# Altium PCB Chrono_dot.PcbDoc
Units mil, origin at the board's own origin, x right, y up, seen from the top; angles counter-clockwise.
Board outline 1890 x 1320 mil, 2 copper layers (Top Layer, Bottom Layer), stack 65.792 mil thick; 4 components, 4 nets, 22 pads, 68 vias.
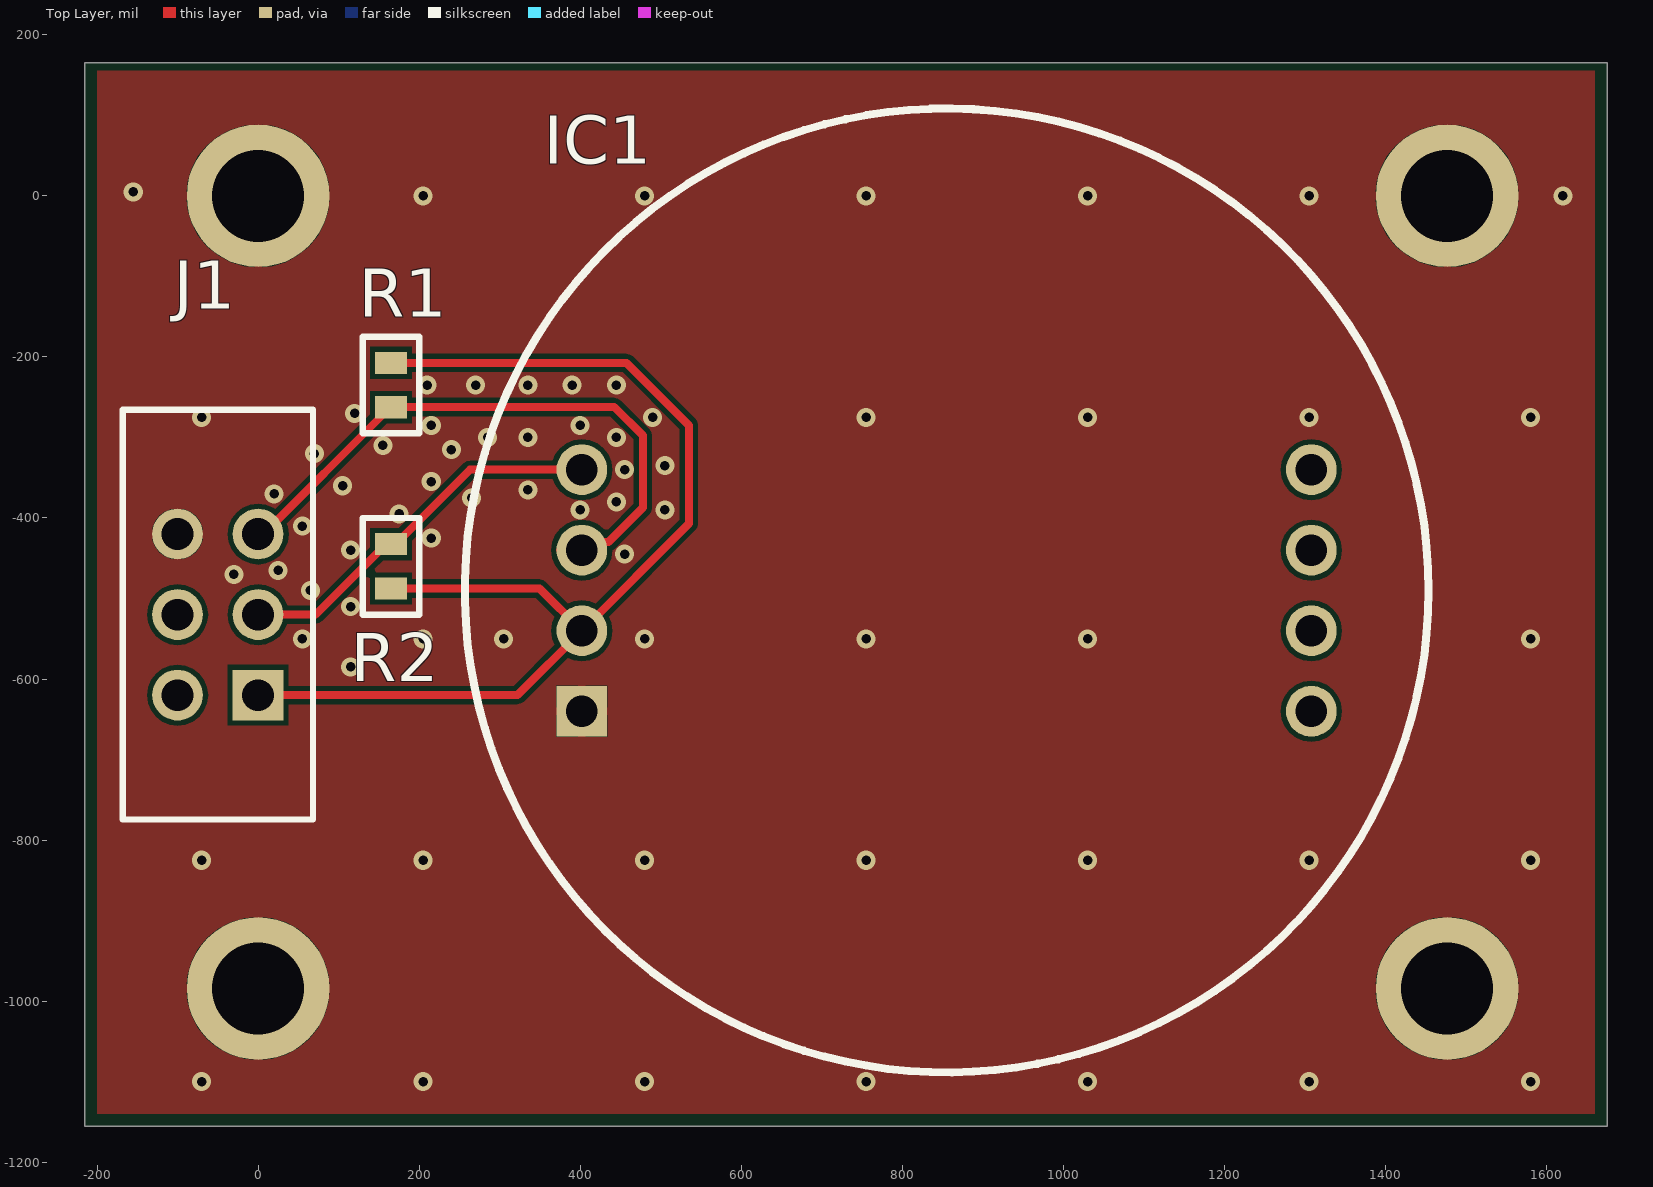
[diagram p0: Top Layer view]
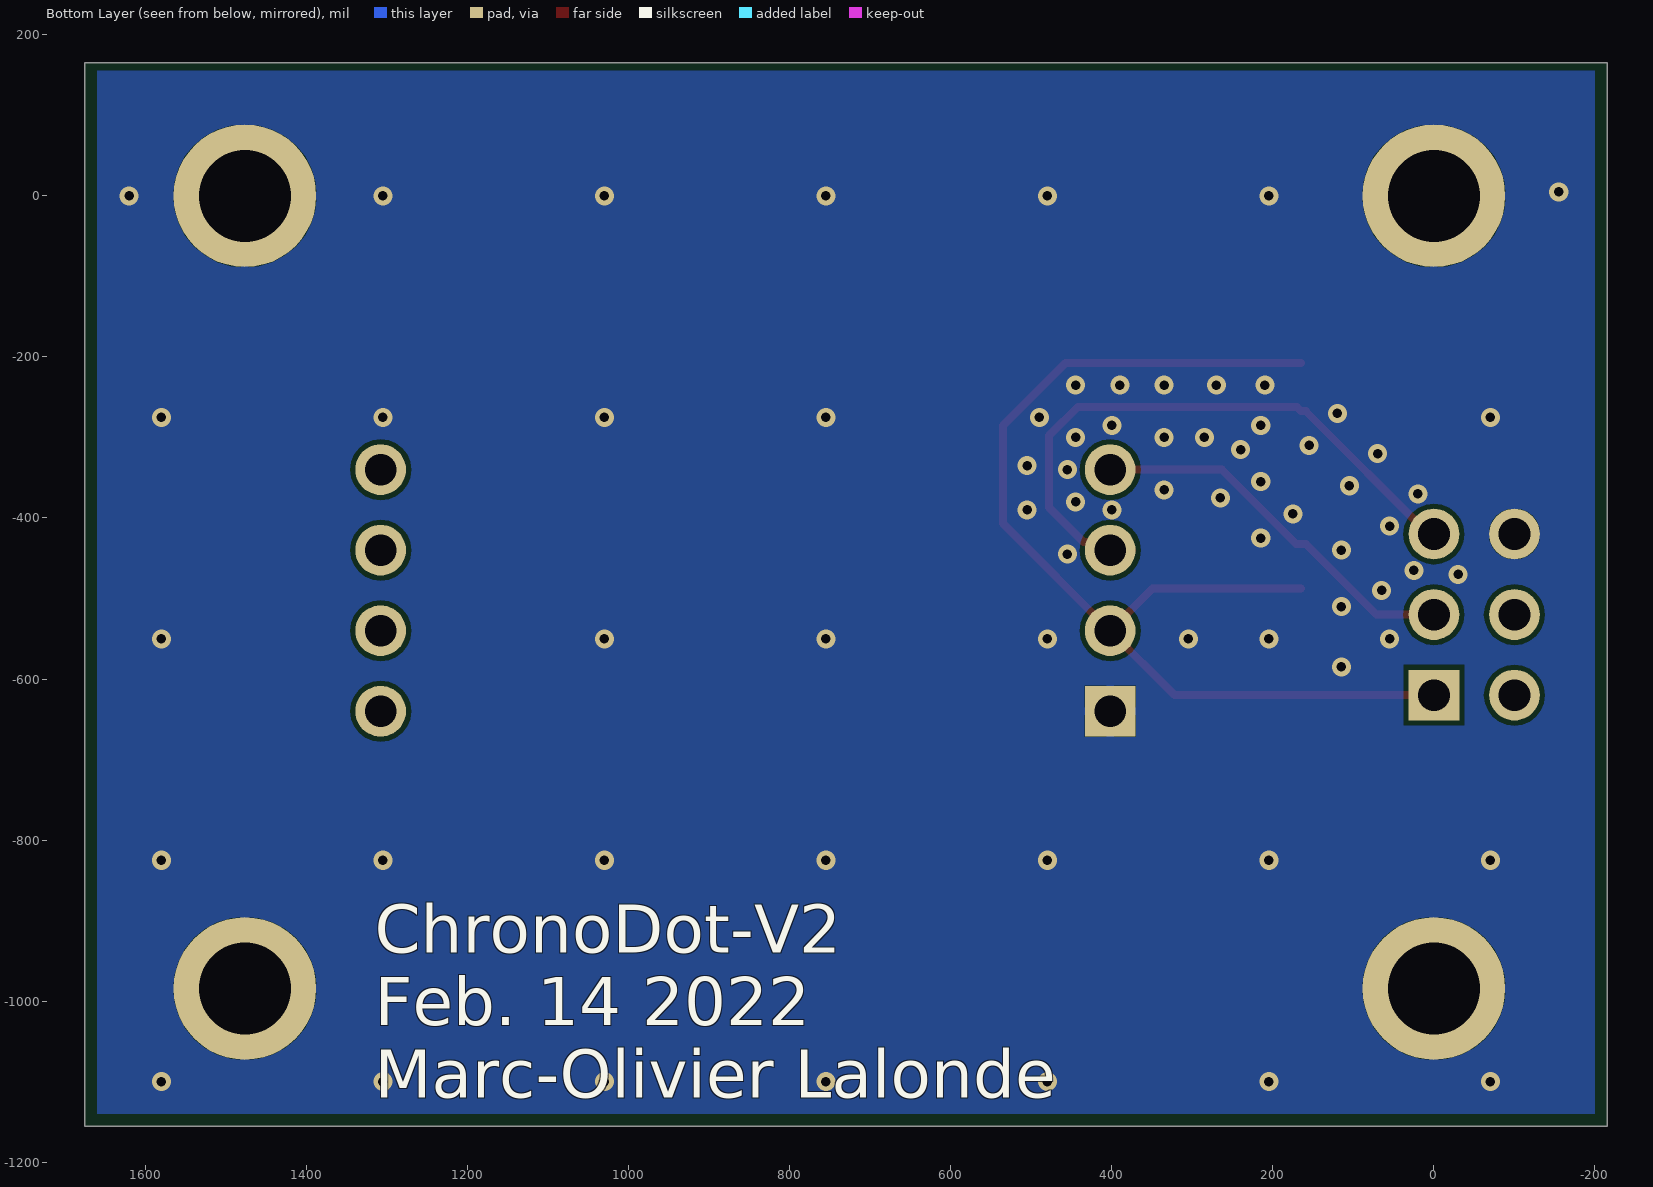
[diagram p1: Bottom Layer view, seen from below]

## Layer stack, top to bottom
Top Solder: solder mask 0.4, Solder Resist, Dk 3.5
Top Layer: signal copper 1.4
Dielectric 1: dielectric 62.9921, FR-4, Dk 4.8
Bottom Layer: signal copper 1.4
Bottom Solder: solder mask 0.4, Solder Resist, Dk 3.5

## Board outline
1675,165 -215,165 -215,-1155 1675,-1155

## Design rules (kind name [scope] priority, off if disabled: settings)
Clearance [All] p1: gap=6 ignorepadtopadclearanceinfootprint=TRUE except(0: Arc-Hole Track-Hole SMDPad-Hole THPad-Hole Via-Hole Fill-Hole Poly-Hole Region-Hole Text-Hole)
HoleSize [All] p1: absolutevalues=TRUE maxlimit=244.09 minlimit=7.87 maxpercent=80.000 minpercent=20.000
PolygonConnect [(ObjectKind = 'Via') And (InNet('GND')) vs ((ObjectKind = 'Poly') And (Net = 'GND'))] p1: connectstyle=Direct reliefconductorwidth=10 reliefentries=4 polygonreliefangle="90 Angle" airgapwidth=10
RoutingVias [All] p1: holewidth=28 width=50 viastyle="Through Hole" minholewidth=28 minwidth=50 maxholewidth=28 maxwidth=50
SolderMaskExpansion [All] p1: expansion=4
Width [All] p1: maxlimit=10 minlimit=6 preferedwidth=10
29 further rules are at their usual default settings.

## Classes and differential pairs
component class Chrono_dot: IC1 J1 R1

## Components (designator, comment, footprint, x,y, rotation, side; value= is the part's Value field where it differs from the comment)
IC1 "ChronoDot V2.1" CHRONODOT 855,-490 r90 top
J1 "Ribbon_6" RIBBON62 -50,-520 r90 top
R1 "Res1" 0603 165,-235 r90 top value=10K
R2 "Res1" 0603 165,-460 r270 top value=10K

## Footprints (in the part's own frame and the unit in brackets; to place one, negate y for a bottom-side part, rotate by r counter-clockwise, add the part's x,y. Pads: shape width x height; smd on the part's side, far side on the other; paste and mask are expansions set on the pad)
0603 [mm]
  rect 0.7x1 smd: 1(-0.7,0) 2(0.7,0)
  silkscreen extent -1.52,-0.89 1.52,0.89
CHRONODOT [mm]
  rect 1.6x1.6 hole 1: 1(-3.81,11.506)
  round 1.6 hole 1: 2(-1.27,11.506) 3(1.27,11.506) 4(3.81,11.506) 5(-3.81,-11.5) 6(-1.27,-11.5) 7(1.27,-11.5) 8(3.81,-11.5)
  silkscreen extent -15.2,-15.2 15.2,15.2
RIBBON62 [mm]
  rect 1.6x1.6 hole 1: 1(-2.54,-1.27)
  round 1.6 hole 1: 2(-2.54,1.27) 3(0,-1.27) 4(0,1.27) 5(2.54,-1.27) 6(2.54,1.27)
  silkscreen extent -6.46,-3 6.46,3

## Part data
IC1: "CHRONODOT - ULTRA-PRECISE RTC"
J1: "CONN DIP HDR IDC 6POS VERT"
R1 R2: "Resistor", LatestRevisionDate=17-Jul-2002, LatestRevisionNote="Re-released for DXP Platform.", PackageDescription="Axial Device, Thru-Hole; 2 Leads; 0.3 in Pin Spacing", PackageReference=AXIAL-0.3, Published=8-Jun-2000, Publisher="Altium Limited"

## Free pads (board coordinates)
  round 177.17 hole 114.17: 2(0,-984.25) 2(0,0) 2(1476.38,-984.25) 2(1476.38,0)

## Via types
v1: diameter 23.62, hole 11.81, Top Layer to Bottom Layer, tented both sides, 68 vias

## Nets (pads, with @x,y where several pads share a name; then routed paths per layer and width w, separated by ;. In a path a pad name is that pad's centre, name@x,y a point inside that pad or via, vN(x,y) a via of type N, cw(c..) or ccw(c..) an arc to the next point about the centre after c; other vN are vias at no path point)
GND: IC1.1 J1.6 pad.2
  other v1: -70,-1100 205,-1100 480,-1100 755,-1100 1030,-1100 1305,-1100 1580,-1100 -70,-825 205,-825 480,-825 755,-825 1030,-825 1305,-825 1580,-825 115,-585 55,-550 205,-550 305,-550 480,-550 755,-550 1030,-550 1580,-550 115,-510 65,-490 -30,-470 25,-465 455,-445 115,-440 215,-425 55,-410 175,-395 400,-390 505,-390 445,-380 265,-375 20,-370 335,-365 105,-360 215,-355 455,-340 505,-335 70,-320 240,-315 155,-310 285,-300 335,-300 445,-300 215,-285 400,-285 -70,-275 490,-275 755,-275 1030,-275 1305,-275 1580,-275 120,-270 210,-235 270,-235 335,-235 390,-235 445,-235 205,0 480,0 755,0 1030,0 1305,0 1620,0 -155,5
SCL: IC1.3 J1.5 R1.1 | length 750
  Top Layer w10: J1.5 6.54,-420 159.09,-267.44 165,-267.44 170.25,-262.19 442.19,-262.19 477.81,-297.81 477.81,-387.19 435,-430 412,-430 IC1.3 ; IC1.3@375,-440 IC1.3@380,-440
SDA: IC1.4 J1.3 R2.1 | length 476.6
  Top Layer w10: J1.3 71.54,-520 159.09,-432.44 R2.1 170.91,-432.44 263.35,-340 IC1.4
VCC: IC1.2 J1.1 R1.2 R2.2 | length 1406.1
  Top Layer w10: J1.1 322,-620 IC1.2 ; R2.2 349.56,-487.56 IC1.2 ; R1.2 457.44,-207.44 535,-285 535,-407 IC1.2
pads on no net: IC1.5 IC1.6 IC1.7 IC1.8 J1.2 J1.4

## Polygon pours and split planes (outlines as drawn)
GND on Bottom Layer "Bottom Layer-GND" (solid, pour order 2): -200,155 1660,155 1660,-1140 -200,-1140
GND on Top Layer (solid, pour order 6): -200,155 1660,155 1660,-1140 -200,-1140

## Silkscreen, mask and mechanical layers (free items; w line width, h text height)
Bottom Overlay:
  text "ChronoDot-V2 / Feb. 14 2022 / Marc-Olivier Lalonde" at 1315,-1120 h60
Board Outline:
  the board outline again, w3.94